# Altium PCB wius.PcbDoc (part 2 of 2)
Units mm, origin at the board's own origin, x right, y up, seen from the top; angles counter-clockwise.
Board outline 54.2 x 28 mm, 6 copper layers (Top Layer, Int1 (GND), Int2 (Sign), Int3 (Sign), Int4 (GND), Bottom Layer), stack 0.776 mm thick; 119 components, 109 nets, 466 pads, 337 vias.
Unrouted connection lines stored in the file: 8.
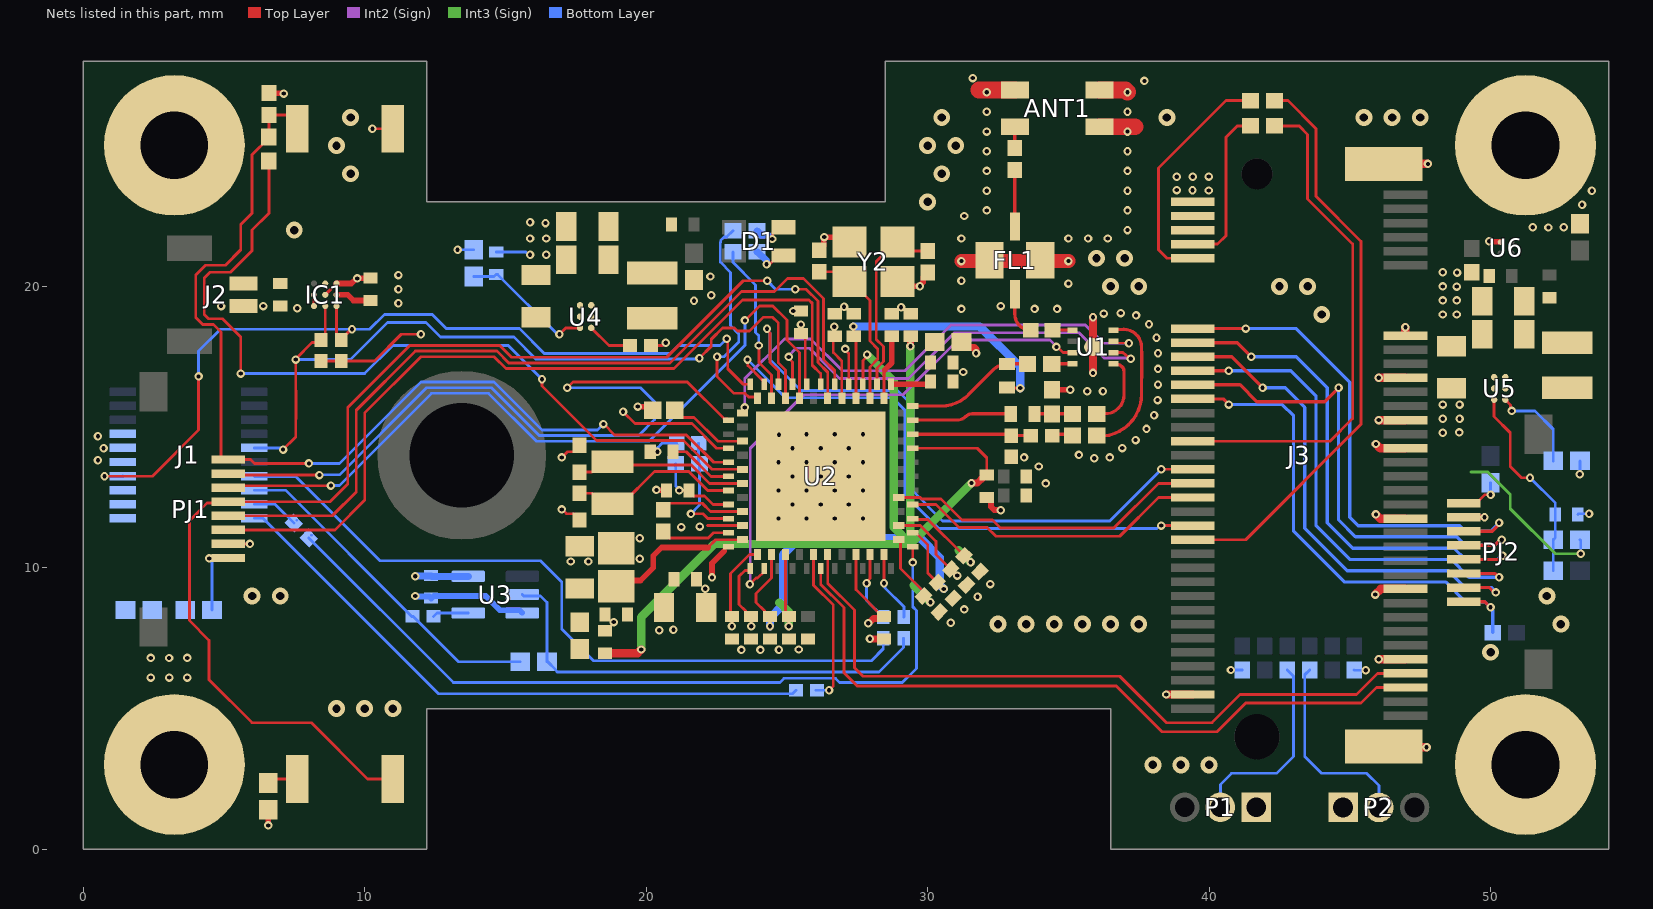
[diagram p6: the nets of this part, all layers, seen from the top]

## Via types
v1: diameter 0.3, hole 0.15, Top Layer to Bottom Layer, tented both sides, 299 vias
v2: diameter 0.6, hole 0.3, Top Layer to Bottom Layer, tented both sides, 37 vias
v3: diameter 0.3/0.3/0.3/0.3/0.3/0.3 (per signal layer), hole 0.15, Top Layer to Bottom Layer, tented both sides, 1 vias

## Nets (pads, with @x,y where several pads share a name; then routed paths per layer and width w, separated by ;. In a path a pad name is that pad's centre, name@x,y a point inside that pad or via, vN(x,y) a via of type N, cw(c..) or ccw(c..) an arc to the next point about the centre after c; other vN are vias at no path point) (continued)
GND: ANT1.2 ANT1.3 ANT1.4 C2.2 C3.2 C5.2 C7.2 C10.2 C11.2 C12.1 C13.1 C14.2 C15.2 C16.2 C17.2 C18.2 C19.2 C21.2 C22.1 C23.2 C24.2 C25.2 C26.2 C27.2 C28.2 C29.2 C30.2 C31.2 C32.2 C33.2 C34.2 C35.2 C36.2 C37.2 C38.2 C39.2 C40.2 C41.2 C42.2 C43.2 C44.1 C45.1 C46.1 C47.2 C48.1 C49.1 C50.2 C51.2 C52.1 C53.2 C54.2 FL1.1 FL1.3 IC1.B2 IC1.C3 J1.09 J1.11 J1.13 J2.2 J3.2 J3.4 J3.6 J3.21 J3.27 J3.33 J3.37 J3.47 J3.57 J3.67 J3.72 J3.SH1 J3.SH2 P1.1 P2.1 pad.1 PJ1.2 PJ2.2 R3.1 R13.1 R20.1 R23.2 R25.2 R29.2 SW1.1 U1.9 U2.A15 U2.EP1 U3.3 U4.A1 U5.A1 U6.B1 Y2.2 Y2.4 | length 43.2
  Top Layer w0.1: PJ1.2@5.15,10.85 v1(5.925,10.85) ; IC1.B2@8.6,19.7 IC1.C3@9,20.1 ; v1(10.275,25.6) SW1.1@11,25.6 ; v1(17,13.925) 17.2,14.125 17.425,14.125 17.625,14.325 C3.2@17.625,14.35 ; v1@17.025,12.075 17.175,11.925 17.425,11.925 17.625,11.725 C2.2@17.625,11.7 ; R13.1@20.175,17.9 20.6,17.9 v1(20.7,18) ; v1(27.07,17.777) 27.07,17.746 27.2,17.616 U2.A15@27.2,16.525
  Top Layer w0.2: v1(6.573,0.848) 6.573,1.405 R3.1@6.572,1.406 ; C42.2@6.6,26.865 6.607,26.858 7.121,26.858 v1(7.128,26.85) ; IC1.C3@9,20.1 9.525,20.1 9.708,20.283 v1(9.735,20.283) 9.743,20.291 10.191,20.291 C47.2@10.2,20.3 ; v1(19.703,15.729) 20.107,15.729 C25.2@20.236,15.6 ; C26.2@20.15,14.125 20.152,14.123 v1(20.4,14.122) v1(20.4,14.122) ; v1(20.365,12.77) 20.375,12.76 20.715,12.76 C28.2@20.725,12.75 ; v1(25.225,19.125) C17.2@25.5,19.125 ; C39.2@26.15,21.28 26.31,21.44 26.31,21.703 26.331,21.724 v1(26.331,21.751) 27.049,21.751 Y2.2@27.225,21.575 ; Y2.4@28.925,20.175 29.096,20.004 v1(29.726,20.004) 29.726,20.031 29.84,20.145 29.84,20.335 C40.2@30,20.495 ; C33.2@32.101,12.495 32.151,12.495 32.251,12.395 32.251,12.172 32.369,12.055 32.595,12.055 v1(32.6,12.05) ; C5.2@34.616,16.323 34.62,16.327 v1(35.069,16.327) ; PJ2.2@49.05,11.8 v1(49.783,11.8) ; v1(49.95,21.6) 49.969,21.581 50.344,21.581 U6.B1@50.35,21.575
  Top Layer w0.25: v1(27.95,7.478) 27.951,7.476 28.449,7.476 C19.2@28.45,7.475
  Top Layer w0.3: v1(35.875,16.925) v1(35.875,18.9) ; v1(38.475,5.5) J3.72@39.425,5.5 ; v1(45.9,9.05) 46.1,9.25 J3.57@46.975,9.25 ; v1(45.925,11.9) 46.075,11.75 J3.47@46.975,11.75 ; v1(45.925,14.4) 46.075,14.25 J3.37@46.975,14.25 ; v1(46.025,6.75) J3.67@46.975,6.75 ; v1(46.025,15.25) J3.33@46.975,15.25 ; v1(46.025,16.75) J3.27@46.975,16.75 ; J3.SH2@46.2,3.65 46.225,3.625 v1(47.725,3.625) ; J3.SH1@46.2,24.35 v1(47.775,24.35) ; J3.21@46.975,18.25 v1(46.975,18.55)
  Top Layer w0.5: v1(31.2,20.9) v1(35,20.9)
  Top Layer w0.6: 31.829,26.971 ANT1.4@33.1,26.971 ; ANT1.2@36.1,25.671 37.371,25.671 ; ANT1.3@36.1,26.971 37.029,26.971 v1(37.1,26.9)
  Bottom Layer w0.1: C53.2@14.675,21.225 15.721,21.225 15.821,21.125 v1(15.875,21.125) ; v1(20.4,14.122) 20.419,14.141 20.419,14.282 20.562,14.425 C41.2@21.085,14.425 ; v1(40.776,6.371) 41.171,6.371 R23.2@41.175,6.375 ; R25.2@45.15,6.375 45.16,6.365 v1(45.562,6.365) ; C54.2@53.1,11.9 53.123,11.923 v1(53.498,11.923) ; v1(53.171,13.327) 53.171,13.796 R29.2@53.175,13.8
  Bottom Layer w0.2: v1(11.8,9) 11.819,8.981 12.294,8.981 12.369,8.906 12.463,9 14.3,9 14.8,8.5 15.5,8.5 U3.3@15.6,8.4
  other v1: 23.384,7.085 24.059,7.085 24.715,7.092 25.421,7.1 20.464,7.786 20.97,7.8 30.825,8.05 18.85,8.075 31.3,8.525 31.775,8.975 32.225,9.425 17.325,10.225 17.95,10.225 24.7,11.75 25.7,11.75 26.7,11.75 27.7,11.75 17,12.075 25.2,12.25 26.2,12.25 27.2,12.25 24.7,12.75 25.7,12.75 26.7,12.75 27.7,12.75 34.2,13 25.2,13.25 26.2,13.25 27.2,13.25 33.95,13.6 24.7,13.75 25.7,13.75 26.7,13.75 27.7,13.75 0.525,13.825 35.917,13.89 33.425,13.925 36.47,13.922 35.376,14.011 0.725,14.25 25.2,14.25 26.2,14.25 27.2,14.25 36.912,14.256 37.388,14.538 0.525,14.675 24.719,14.731 25.7,14.75 26.7,14.75 27.7,14.75 37.775,14.935 38.044,15.419 38.168,15.959 35.672,16.273 36.226,16.278 38.184,16.513 31.266,16.958 38.185,17.067 38.185,17.621 38.13,18.172 37.864,18.658 37.406,18.97 48.3,19 48.8,19 36.26,19.034 36.858,19.05 31.2,19.2 33.8,19.2 34.6,19.2 7.604,19.224 29.057,19.261 27.034,19.275 4.9,19.3 6.4,19.3 32.6,19.3 48.3,19.5 48.8,19.5 48.3,20 48.801,19.992 35,20.1 31.2,20.2 48.3,20.5 48.809,20.49 16.45,21.125 15.875,21.7 16.45,21.7 31.2,21.7 35,21.7 35.7,21.7 36.4,21.7 37.1,22 16.425,22.25 15.875,22.275 31.3,22.5 32.1,22.7 37.1,22.7 32.1,23.4 37.1,23.4 39.984,23.406 38.85,23.42 39.409,23.414 38.847,23.896 39.415,23.893 39.984,23.899 32.1,24.1 37.1,24.1 32.1,24.8 37.1,24.8 32.1,25.5 37.1,25.5 32.1,26.2 37.1,26.2 32.1,26.9 37.7,27.3 31.6,27.4
  other v2: 38,3 39,3 40,3 9,5 10,5 11,5 50,7 32.5,8 33.5,8 34.5,8 35.5,8 36.5,8 37.5,8 52.5,8 6,9 7,9 52,9 44,19 36.5,20 37.5,20 42.5,20 43.5,20 36,21 37,21 7.5,22 30,23 9.5,24 30.5,24 9,25 30,25 31,25 9.5,26 30.5,26 38.5,26 45.5,26 46.5,26 47.5,26
GPIO0: J3.50 R18.2 | length 20.7
  Top Layer w0.1: J3.50@39.425,11 41.3,11 45.4,15.1 45.4,21.6 43.8,23.2 43.8,25.6 42.8,26.6 R18.2@42.325,26.6
GPIO88: J3.36 R17.2 | length 18.1
  Top Layer w0.1: J3.36@39.425,14.5 44.3,14.5 45.1,15.3 45.1,21.5 43.5,23.1 43.5,25.4 43.2,25.7 R17.2@42.325,25.7
I2C_FG_SCL: IC1.B1 J1.12 R8.1 U2.B18 | length 28.8
  Top Layer w0.1: v1(7.1,14.2) 7.521,14.621 7.55,14.65 7.555,15.295 ccw(c7.125,15.3) 7.555,15.301 7.55,17.342 v1(7.55,17.4) 7.55,17.425 8.134,18.009 8.359,18.009 8.6,18.25 IC1.B1@8.6,19.3 ; v1(21.892,17.45) 22.313,17.872 22.313,18.123 22.708,18.518 23.134,18.518 23.242,18.41 23.668,18.41 24.158,18.9 24.5,18.9 24.69,18.71 24.69,17.293 24.95,17.033 U2.B18@24.95,16.025
  Bottom Layer w0.1: J1.12@6.075,14.26 7.04,14.26 v1(7.1,14.2) ; v1(7.55,17.4) 9.5,17.4 10.817,18.717 12.183,18.717 12.7,18.2 15.3,18.2 16.08,17.42 21.861,17.42 v1(21.892,17.45)
I2C_FG_SDA: IC1.C1 J1.07 R7.1 U2.A22 | length 31.5
  Top Layer w0.1: v1(0.757,13.252) 2.452,13.252 4.1,14.9 v1(4.1,16.8) ; IC1.C1@9,19.3 9,18.272 R7.1@9.172,18.1 9.172,18.125 9.522,18.475 v1(9.55,18.475) ; v1(22.866,18.138) 22.901,18.104 22.901,17.074 23.45,16.525 U2.A22@23.7,16.525
  Bottom Layer w0.1: v1(0.757,13.252) 1.397,13.252 J1.07@1.405,13.26 ; v1(4.1,16.8) 4.1,17.7 4.875,18.475 v1(9.55,18.475) 10.175,18.475 10.7,19 12.4,19 12.9,18.5 15.5,18.5 16.38,17.62 20.857,17.62 21.137,17.9 22.627,17.9 v1(22.866,18.138)
JTAG_CLK: J3.20 PJ2.3 | length 18.2
  Top Layer w0.117: J3.20@39.425,18.5 v1(41.3,18.5) ; PJ2.3@49.05,11.3 50.058,11.3 50.141,11.382 50.141,11.391 50.3,11.55 v1(50.3,11.6)
  Bottom Layer w0.117: v1(41.3,18.5) 43.1,18.5 45,16.6 45,11.8 45.3,11.5 48.9,11.5 49.1,11.3 50,11.3 v1(50.3,11.6)
JTAG_NTRST: J3.24 PJ2.7 | length 18
  Top Layer w0.117: J3.24@39.425,17.5 40.8,17.5 v1(41.9,16.4) ; PJ2.7@49.05,9.3 49.115,9.235 49.18,9.3 49.961,9.3 50.135,9.126 v1(50.184,9.126)
  Bottom Layer w0.117: v1(41.9,16.4) 42.7,16.4 43.4,15.7 43.4,11.4 44.9,9.9 48.5,9.9 49.1,9.3 50.05,9.3 50.184,9.166 v1(50.184,9.126)
JTAG_TDI: J3.26 PJ2.6 | length 17.9
  Top Layer w0.117: J3.26@39.425,17 v1(40.7,17) ; PJ2.6@49.05,9.8 49.917,9.8 50.14,9.8 50.272,9.668 v1(50.3,9.668)
  Bottom Layer w0.117: v1(40.7,17) 42.9,17 43.8,16.1 43.8,11.5 45,10.3 48.6,10.3 49.232,9.668 v1(50.3,9.668)
JTAG_TDO: J3.22 PJ2.5 | length 18.5
  Top Layer w0.117: J3.22@39.425,18 41,18 v1(41.5,17.5) ; PJ2.5@49.05,10.3 50.3,10.3 v1(50.428,10.428)
  Bottom Layer w0.117: v1(41.5,17.5) 43.1,17.5 44.2,16.4 44.2,11.6 45.1,10.7 48.7,10.7 49.1,10.3 50.25,10.3 50.378,10.428 v1(50.428,10.428)
JTAG_TMS: J3.28 PJ2.4 | length 18
  Top Layer w0.117: J3.28@39.425,16.5 41.1,16.5 41.7,15.9 44.1,15.9 v1(44.6,16.4) ; PJ2.4@49.05,10.8 50.15,10.8 50.35,11 v1(50.4,11)
  Bottom Layer w0.117: v1(44.6,16.4) 44.6,11.7 45.2,11.1 48.8,11.1 49.1,10.8 50.15,10.8 50.35,11 v1(50.4,11)
LED_G: R11.1 U2.B20 | length 7.9
  Top Layer w0.1: v1(22.521,17.501) 22.521,16.804 23.125,16.2 23.513,16.2 23.646,16.066 23.909,16.066 U2.B20@23.95,16.025
  Bottom Layer w0.1: v1(22.521,17.501) 22.765,17.501 23.291,18.026 23.291,18.318 23,18.609 23,20.496 22.635,20.861 22.635,21.562 22.648,21.574 22.648,21.624 22.774,21.75 22.86,21.75 R11.1@23.085,21.975
LED_R: R10.1 U2.B19 | length 5.8
  Top Layer w0.1: v1(24,17.9) 24.008,17.892 24.008,17.292 24.45,16.85 U2.B19@24.45,16.025
  Bottom Layer w0.1: R10.1@23.085,21.225 23.083,21.222 23.083,20.859 23.89,20.051 23.89,18.364 24,18.254 v1(24,17.9)
NetANT1_1: ANT1.1 C9.2 | length 0.8
  Top Layer w0.117: C9.2@33.1,24.911 ANT1.1@33.1,25.671
NetC1_1: C1.1 U1.4 | length 0.6
  Top Layer w0.117: C1.1@34.407,17.246 U1.4@35.025,17.246
NetC1_2: C1.2 L1.1 U2.A11 | length 4.6
  Top Layer w0.117: U2.A11@29.475,15.75 30.484,15.75 ccw(c30.484,17.116) 31.45,16.15 32.35,17.05 cw(c32.825,16.574) L1.1@32.825,17.246 C1.2@33.55,17.246
NetC2_1: C2.1 U2.A29 Y1.1 | length 6.2
  Top Layer w0.1: C2.1@17.625,12.65 18.075,12.65 18.45,12.275 Y1.1@18.8,12.275 19.15,12.275 20.3,13.425 20.7,13.425 ; 20.701,13.426 21.511,13.426 22.187,12.75 U2.A29@22.925,12.75
NetC3_1: C3.1 U2.B26 Y1.2 | length 6.3
  Top Layer w0.1: C3.1@17.625,13.4 18.075,13.4 18.45,13.775 Y1.2@18.8,13.775 18.925,13.65 21.6,13.65 22.25,13 U2.B26@23.425,13
NetC4_1: C4.1 U1.5 | length 2.6
  Top Layer w0.117: C4.1@36.007,15.475 C4.1@36.004,15.471 36.296,15.471 ccw(c36.296,16.15) 36.975,16.15 36.975,16.975 ccw(c36.725,16.975) U1.5@36.725,17.225
NetC4_2: C4.2 C5.1 L2.1 | length 1.3
  Top Layer w0.117: L2.1@33.798,15.471 C4.2@35.146,15.471
NetC6_1: C6.1 U1.8 | length 5.1
  Top Layer w0.117: C6.1@36.253,14.68 ccw(c36.105,16.167) 37.6,16.167 37.602,17.271 37.602,17.593 37.6,17.84 ccw(c36.967,17.84) 36.971,18.473 ccw(c36.971,18.357) 36.962,18.473 U1.8@36.717,18.455
NetC6_2: C6.2 L3.1 | length 0.8
  Top Layer w0.117: L3.1@34.4,14.7 34.446,14.746 C6.2@35.15,14.746
NetC7_1: C7.1 L3.2 U2.A9 | length 4.2
  Top Layer w0.117: U2.A9@29.475,14.75 32.854,14.75 cw(c32.854,14.579) C7.1@32.975,14.7 L3.2@33.668,14.7
NetC8_1: C8.1 U1.1 | length 0.6
  Top Layer w0.117: C8.1@34.44,18.446 34.64,18.446 U1.1@35.05,18.446
NetC8_2: C8.2 FL1.4 | length 1.6
  Top Layer w0.117: FL1.4@33.1,19.721 33.1,19.006 ccw(c33.66,19.006) C8.2@33.66,18.446
NetC9_1: C9.1 FL1.2 | length 2
  Top Layer w0.117: FL1.2@33.1,22.121 C9.1@33.1,24.131
NetC20_1: C20.1 U2.B28 | length 3
  Top Layer w0.1: C20.1@20.658,12.139 20.815,12.297 21.993,12.297 22.29,12 U2.B28@23.425,12
NetC20_2: C20.2 U2.A32 | length 2.3
  Top Layer w0.1: C20.2@20.767,11.108 20.816,11.058 20.875,11.058 22.208,11.058 22.4,11.25 U2.A32@22.925,11.25
NetC39_1: C39.1 U2.B12 Y2.3 | length 5.9
  Top Layer w0.1: C39.1@26.15,20.52 26.88,20.52 Y2.3@27.225,20.175 27.275,20.175 27.95,19.5 27.95,18.055 28.23,17.775 28.23,17.418 27.95,17.138 U2.B12@27.95,16.025
NetC40_1: C40.1 U2.A13 Y2.1 | length 6.8
  Top Layer w0.1: U2.A13@28.2,16.525 28.2,17.105 28.43,17.335 28.43,17.858 28.175,18.113 28.175,20.875 28.875,21.575 Y2.1@28.925,21.575 29.245,21.255 C40.1@30,21.255
NetC45_2: C45.2 C46.2 FB1.1 L5.2 U4.A2
NetC47_1: C47.1 IC1.C2 | length 1.3
  Top Layer w0.2: IC1.C2@9,19.7 9.003,19.697 9.403,19.697 9.6,19.5 C47.1@10.2,19.5
NetC49_2: C49.2 C52.2 FB2.1 L6.2 U5.A2
NetC53_1: C53.1 R27.2 U4.C1 | length 4.8
  Top Layer w0.1: v1(16.918,18.298) 17.145,18.525 U4.C1@17.65,18.525
  Bottom Layer w0.1: R27.2@13.875,20.35 14.6,20.35 C53.1@14.675,20.425 14.725,20.425 16.813,18.337 16.88,18.337 v1(16.918,18.298)
NetC54_1: C54.1 R28.2 R30.2 U5.C1 | length 7.2
  Top Layer w0.1: U5.C1@50.125,15.975 50.125,15.375 50.7,14.8 50.7,13.6 51.1,13.2 v1(51.4,13.2)
  Bottom Layer w0.1: v1(51.4,13.2) 52.3,12.3 C54.1@52.3,11.9 52.3,11.075 R28.2@52.225,11 R30.2@52.225,9.9
NetD1_2: D1.2 R10.2 | length 1.3
  Top Layer w0.1: v1(24.28,20.789) 24.334,20.789 24.375,20.83 24.43,20.83 24.7,21.1 D1.2@24.875,21.1
  Bottom Layer w0.25: R10.2@23.935,21.225 23.96,21.225 24.27,20.915 24.27,20.798 v1(24.28,20.789)
NetD1_4: D1.4 R11.2 | length 1.3
  Top Layer w0.1: v1(24.477,21.683) 24.5,21.706 24.5,21.9 24.7,22.1 D1.4@24.875,22.1
  Bottom Layer w0.25: R11.2@23.935,21.975 24.085,21.825 24.321,21.825 24.454,21.692 v1@24.467,21.692
NetJ1_02: J1.02 R33.2 | length 21.9
  Bottom Layer w0.1: J1.02@6.075,11.76 6.39,11.76 12.625,5.525 25.2,5.525 R33.2@25.325,5.65
NetJ1_04: J1.04 R32.2 | length 1.7
  Bottom Layer w0.1: J1.04@6.075,12.26 6.815,12.26 R32.2@7.485,11.59
NetJ1_08: J1.08 R31.2 | length 26.6
  Bottom Layer w0.1: J1.08@6.075,13.26 6.085,13.25 7.55,13.25 10.55,10.25 16.25,10.25 17,9.5 17,7.825 18.125,6.7 28,6.7 28.425,7.125 R31.2@28.425,7.5
NetJ3_8: J3.8 R17.1 | length 5.8
  Top Layer w0.1: J3.8@39.425,21.5 40.3,21.5 40.6,21.8 40.6,25.3 41,25.7 R17.1@41.475,25.7
NetJ3_10: J3.10 R18.1 | length 8.5
  Top Layer w0.1: J3.10@39.425,21 38.5,21 38.2,21.3 38.2,24.2 40.6,26.6 R18.1@41.475,26.6
NetL2_2: L2.2 U2.A10 | length 3.5
  Top Layer w0.117: U2.A10@29.475,15.25 31.048,15.25 ccw(c31.048,15.677) 31.35,15.375 cw(c31.583,15.142) 31.583,15.471 L2.2@32.952,15.471
NetL4_1: L4.1 U2.B29 | length 1.2
  Top Layer w0.1: 22.175,11.5 U2.B29@23.425,11.5
  other v1: 19.775,10.325 19.775,11.05 21.25,11.45 21.908,11.464
NetL5_1: L5.1 U4.B2
NetL6_1: L6.1 U5.B2
NetP1_2: P1.2 R15.2 | length 7
  Bottom Layer w0.1: P1.2@40.4,1.5 40.4,2.3 40.8,2.7 42.4,2.7 43,3.3 43,4.712 43,6.15 R15.2@42.775,6.375
NetP2_2: P2.2 R16.2 | length 7
  Bottom Layer w0.1: R16.2@43.575,6.375 43.4,6.2 43.4,3.3 44,2.7 45.6,2.7 46.03,2.27 P2.2@46.03,1.487
NetPJ1_1: PJ1.1 R9.1 | length 2.6
  Top Layer w0.1: v1(4.48,10.334) 5.134,10.334 PJ1.1@5.15,10.35
  Bottom Layer w0.1: v1(4.48,10.334) 4.48,10.28 4.575,10.185 R9.1@4.575,8.5
NetPJ2_1: PJ2.1 R14.1 | length 1.5
  Top Layer w0.1: PJ2.1@49.05,12.3 49.5,12.3 49.8,12.6 v1(50,12.6)
  Bottom Layer w0.1: v1(50,12.6) R14.1@50,13.025
NetR3_2: R3.2 SW2.1 | length 1
  Top Layer w0.1: R3.2@6.547,2.381 R3.2@6.572,2.356 ; R3.2@6.625,2.5 SW2.1@7.6,2.5
NetR4_1: R4.1 R35.2 U3.2 | length 16.6
  Bottom Layer w0.1: U3.2@15.6,9.05 15.65,9 16.25,9 16.475,8.775 16.475,6.669 R4.1@16.478,6.666 16.503,6.666 16.778,6.391 16.778,6.366 16.844,6.3 28.275,6.3 29.146,7.171 29.146,7.496 R35.2@29.15,7.5
NetR13_2: R13.2 U4.C2 | length 1.6
  Top Layer w0.1: U4.C2@18.05,18.525 18.675,17.9 R13.2@19.425,17.9
NetR29_1: R29.1 U5.C2 | length 3.4
  Top Layer w0.1: U5.C2@50.525,15.975 U5.C2@50.525,15.975 50.712,15.787 50.712,15.613 v1(50.75,15.575)
  Bottom Layer w0.1: v1(50.75,15.575) 51.575,15.575 52.225,14.925 R29.1@52.225,13.8
NetR34_1: R34.1 U3.4 | length 1.3
  Bottom Layer w0.1: R34.1@12.45,8.275 12.575,8.4 U3.4@13.68,8.4
NRESET: J3.30 PJ2.8 R26.1 | length 18
  Top Layer w0.117: J3.30@39.425,16 40.5,16 v1(40.7,15.8) ; PJ2.8@49.05,8.8 49.8,8.8 v1(50,8.6)
  Bottom Layer w0.117: v1(40.7,15.8) 42.6,15.8 43,15.4 43,11.3 44.8,9.5 48.4,9.5 49.1,8.8 49.8,8.8 v1(50,8.6) 50,8.55 50.075,8.475 R26.1@50.075,7.7
POC_IN: C42.1 PJ1.8 R6.1 SW1.2 U2.A27 | length 36.5
  Top Layer w0.1: PJ1.8@4.8,13.85 PJ1.8@5.1,13.85 ; SW1.2@7.6,25.6 7.6,25.735 7.25,26.085 C42.1@6.6,26.085 6.6,25.275 6,24.675 6,22.6 5.6,22.2 5.6,21.3 5.05,20.75 4.35,20.75 4,20.4 4,18.9 4.25,18.65 4.632,18.65 4.9,18.382 4.9,13.95 5,13.85 PJ1.8@5.1,13.85 ; v1(8.019,13.709) 6.091,13.709 5.95,13.85 PJ1.8@5.15,13.85 PJ1.8@5.1,13.85 ; v1(18.483,15.108) 18.498,15.108 18.882,14.725 20.605,14.725 21.425,14.725 22.4,13.75 U2.A27@22.925,13.75
  Bottom Layer w0.1: v1(8.019,13.709) 9.109,13.709 12,16.6 14.6,16.6 16.3,14.9 18.267,14.9 18.475,15.108 v1(18.483,15.108)
POC_OUT: R6.2 U2.B25 | length 30
  Top Layer w0.1: v1(5.6,16.9) 5.6,18.2 4.95,18.85 4.45,18.85 4.3,19 4.3,20.3 4.5,20.5 5.234,20.5 6,21.266 6,22 6.6,22.6 R6.2@6.6,24.45 ; v1(16.3,16.7) 16.3,16.46 18.235,14.525 20.688,14.525 21.325,14.525 22.35,13.5 U2.B25@23.425,13.5
  Bottom Layer w0.1: v1(5.6,16.9) 10,16.9 11,17.9 15.1,17.9 v1(16.3,16.7)
RESET_MCU: C41.1 R5.1 U2.A31 | length 4.1
  Top Layer w0.1: v1(21.589,11.917) 21.592,11.92 22.019,11.92 22.189,11.75 U2.A31@22.925,11.75
  Bottom Layer w0.1: v1(21.589,11.917) 21.589,11.92 21.9,12.231 R5.1@21.9,13.7 21.865,13.735 C41.1@21.865,14.425
RF_AVDD: C32.1 C33.1 C34.1 C35.1 R2.2 U2.A8 U2.A14 U2.B11 | length 38.3
  Top Layer w0.1: U2.A14@27.7,16.525 27.7,17.371 27.85,17.521 v1(27.85,17.575) ; U2.B11@28.45,16.025 28.45,17.001 28.474,17.026 ; C35.1@29.39,18.215 C35.1@29.4,18.225 ; U2.A8@29.475,14.25 31.761,14.25 32.101,13.909 C33.1@32.101,13.295
  Top Layer w0.2: 28.474,17.026 28.725,17.276 C34.1@28.725,18.225
  Top Layer w0.25: v1(29.39,17.875) C35.1@29.39,18.215 ; v1(31.559,13.011) 31.767,13.011 31.976,13.22 C33.1@32.026,13.22
  Top Layer w0.3: C32.1@18.537,6.969 19.694,6.969 v3(19.825,7.1)
  Int3 (Sign) w0.3: v3(19.825,7.1) 19.825,8.25 22.421,10.846 29.394,10.846 v1(31.559,13.011) ; v1(27.85,17.575) 28.8,16.625 28.8,11.441 29.39,10.85 v1(29.39,17.875)
RF_SW_ANT: U1.7 U2.B21 | length 17.5
  Top Layer w0.1: U2.B21@23.425,15.5 23.5,15.575 v1(23.5,15.7) ; U1.7@36.6,18.046 36.725,17.996 v1(37.149,17.982)
  Int2 (Sign) w0.1: v1(23.5,15.7) 23.5,16.717 24.913,18.13 25.845,18.13 26.975,17 29.2,17 30.825,18.625 35.6,18.625 36.248,17.977 37.144,17.977 v1(37.149,17.982)
RF_SW_ANT_B: U1.6 U2.A19 | length 15.5
  Top Layer w0.1: v1(25.07,17.493) 25.07,17.439 25.2,17.309 U2.A19@25.2,16.525 ; U1.6@36.6,17.646 36.941,17.646 v1(37.214,17.432)
  Int2 (Sign) w0.1: v1(25.07,17.493) 25.07,17.547 25.323,17.8 25.8,17.8 26.875,16.725 29.325,16.725 30.95,18.35 35.375,18.35 36.275,17.45 37.196,17.45 v1(37.214,17.432)
RF_SW_BT_ANT: U1.3 U2.A35 | length 18.9
  Top Layer w0.1: v1(23.685,9.415) 23.905,9.635 23.96,9.635 24.2,9.875 U2.A35@24.2,9.975 ; v1@34.61,17.85 34.813,17.646 U1.3@35.15,17.646
  Int2 (Sign) w0.1: v1(23.685,9.415) 23.7,9.43 23.7,14.25 25.6,16.15 29.125,16.15 31.075,18.1 34.35,18.1 v1@34.653,17.797
  other v1: 34.575,17.85
RF_VBATT: C29.1 C30.1 R1.2 U2.A12 | length 1.4
  Top Layer w0.1: C30.1@30,16.525 C30.1@30.1,16.625
  Top Layer w0.2: U2.A12@28.7,16.525 C30.1@30,16.525
SPI_FPGA_CS: R33.1 U2.B35 | length 5.7
  Top Layer w0.1: U2.B35@25.95,10.475 25.95,9.383 26.65,8.683 26.65,5.809 26.5,5.659 v1(26.5,5.65)
  Bottom Layer w0.1: R33.1@26.025,5.65 v1(26.5,5.65)
SPI_FPGA_MISO: R32.1 U2.A1 | length 28.4
  Top Layer w0.1: v1(29.47,10.192) 29.47,10.745 U2.A1@29.475,10.75
  Bottom Layer w0.1: R32.1@8.015,11.06 13.15,5.925 24.75,5.925 24.9,6.075 26.725,6.075 26.875,5.925 29.1,5.925 29.6,6.425 29.6,8.487 29.47,8.617 v1(29.47,10.192)
SPI_FPGA_MOSI: R31.1 U2.B39 | length 2.5
  Top Layer w0.1: v1(27.83,9.45) 27.83,9.504 27.95,9.624 U2.B39@27.95,10.475
  Bottom Layer w0.1: v1(27.83,9.45) 27.83,8.845 R31.1@28.425,8.25
SPI_FPGA_SCLK: R35.1 U2.B40 | length 2.5
  Top Layer w0.1: v1(28.45,9.45) U2.B40@28.45,10.475
  Bottom Layer w0.1: v1(28.45,9.45) 28.488,9.412 28.488,9.285 29.157,8.617 29.157,8.257 R35.1@29.15,8.25
SPI_FPGA_SCLK_BUF: J1.06 R4.2 R34.2 | length 12
  Bottom Layer w0.1: J1.06@6.075,12.76 7.19,12.76 11.675,8.275 R34.2@11.7,8.275 11.725,8.275 13.334,6.666 R4.2@15.528,6.666
SPI_GAP_CS: J3.48 U2.A21 | length 21.2
  Top Layer w0.1: v1(23.6,17.4) 23.612,17.388 23.612,17.188 24.125,16.675 24.15,16.675 24.2,16.625 U2.A21@24.2,16.525 ; v1(38.3,11.5) J3.48@39.425,11.5
  Bottom Layer w0.1: v1(23.6,17.4) 24.957,16.043 28.757,16.043 29.2,15.6 29.2,12.597 30.397,11.4 38.146,11.4 38.246,11.5 v1(38.3,11.5)
SPI_GAP_MISO: J3.44 U2.A4 | length 11
  Top Layer w0.1: U2.A4@29.475,12.25 30.301,12.25 31.116,11.435 32.115,11.435 32.425,11.125 32.5,11.125 36.675,11.125 36.825,11.125 38.2,12.5 J3.44@39.425,12.5
SPI_GAP_MOSI: J3.42 U2.B4 | length 11.6
  Top Layer w0.1: U2.B4@28.975,12.5 29.737,12.5 29.787,12.45 30.474,12.45 31.224,11.7 32.3,11.7 32.586,11.414 36.614,11.414 38.2,13 J3.42@39.425,13
SPI_GAP_SCLK: J3.40 U2.A20 | length 23.2
  Top Layer w0.1: v1(24.293,18.498) 24.293,18.453 24.4,18.346 24.4,17.3 24.7,17 U2.A20@24.7,16.525 ; v1(38.3,13.5) J3.40@39.425,13.5
  Bottom Layer w0.1: v1(24.293,18.498) 24.293,18.453 24.4,18.346 24.4,17.4 25.5,16.3 28.925,16.3 29.475,15.75 29.475,12.725 30.53,11.67 36.47,11.67 v1(38.3,13.5)
SWD_SWCLK: PJ1.3 U2.A17 | length 29.3
  Top Layer w0.1: PJ1.3@5.15,11.35 8.95,11.35 10,12.4 10,15.5 12,17.5 14.6,17.5 15.02,17.08 20.984,17.08 23.425,19.521 24.74,19.521 ; 24.741,19.52 25.78,19.52 25.9,19.4 25.9,17.2 26.2,16.9 U2.A17@26.2,16.525
SWD_SWDIO: PJ1.4 U2.A16 | length 30.2
  Top Layer w0.1: PJ1.4@5.15,11.85 8.85,11.85 9.7,12.7 9.7,15.6 11.8,17.7 14.7,17.7 15.12,17.28 20.846,17.28 23.386,19.82 24.557,19.82 25.017,20.28 25.586,20.28 26.3,19.566 26.3,17.4 26.7,17 U2.A16@26.7,16.525
SWD_SWO: PJ1.5 SW2.2 U2.B15 | length 45.6
  Top Layer w0.1: SW2.2@11,2.5 10.1,2.5 8.1,4.5 6,4.5 4.475,6.025 4.475,7.425 3.774,8.126 3.774,11.674 4.4,12.3 5.1,12.3 PJ1.5@5.15,12.35 8.767,12.35 9.4,12.983 9.4,15.7 11.6,17.9 14.8,17.9 15.22,17.48 20.732,17.48 23.452,20.2 v1(24.3,20.2) ; v1(25.3,19.9) 25.683,19.9 26.1,19.483 26.1,17.3 26.45,16.95 U2.B15@26.45,16.025
  Bottom Layer w0.1: v1(24.3,20.2) 24.6,19.9 v1(25.3,19.9)
UART_GAP_RX: J3.71 U2.A39 | length 25.5
  Top Layer w0.1: U2.A39@26.2,9.975 26.2,9.416 27.025,8.591 27.025,6.275 27.5,5.8 36.7,5.8 38.325,4.175 40.275,4.175 41.3,5.2 45.4,5.2 45.95,5.75 J3.71@46.975,5.75
UART_GAP_TX: J3.69 U2.B36 | length 25.5
  Top Layer w0.1: U2.B36@26.45,10.475 26.45,9.45 27.4,8.5 27.4,6.45 27.7,6.15 36.825,6.15 38.475,4.5 40.1,4.5 41.1,5.5 45.234,5.5 45.984,6.25 J3.69@46.975,6.25
UART_ULP_RX: PJ1.7 U2.A24 | length 27.7
  Top Layer w0.1: PJ1.7@5.15,13.35 5.205,13.295 v1(8.392,13.295) ; v1(17.2,16.4) 17.4,16.6 21.463,16.6 22.763,15.3 22.875,15.3 U2.A24@22.925,15.25
  Bottom Layer w0.1: v1(8.392,13.295) 8.402,13.305 9.105,13.305 12.2,16.4 14.5,16.4 16.2,14.7 19.736,14.7 20.3,15.264 20.3,15.9 19.8,16.4 v1(17.2,16.4)
UART_ULP_TX: PJ1.6 U2.B17 | length 27.6
  Top Layer w0.1: PJ1.6@5.15,12.85 5.215,12.915 8.55,12.915 8.555,12.92 8.8,12.92 v1(8.802,12.923) ; v1(23.51,18.79) 23.514,18.79 24.024,19.3 24.5,19.3 25,18.8 25,18.1 25.45,17.65 U2.B17@25.45,16.025
  Bottom Layer w0.1: v1(8.802,12.923) 8.805,12.925 9.102,12.925 12.377,16.2 14.4,16.2 16.1,14.5 20.1,14.5 23.51,17.91 v1(23.51,18.79)
UULP_VOUTSCDC: C25.1 U2.B23 | length 2.9
  Top Layer w0.1: C25.1@21.014,15.6 21.267,15.347 21.703,15.347 22.55,14.5 U2.B23@23.425,14.5
UULP_VOUTSCDC_RETN: C26.1 U2.A28 | length 2.3
  Top Layer w0.1: C26.1@20.95,14.125 21.425,14.125 22.3,13.25 U2.A28@22.925,13.25
VBAT: C51.1 IC1.A1 IC1.A2 J2.1 | length 0.4
  Top Layer w0.1: IC1.A1@8.2,19.3 IC1.A2@8.2,19.7
VBUS: J1.01 J1.03 J1.05 R19.2
VIO: C10.1 C13.2 C14.1 C16.1 C21.1 C27.1 C28.1 C31.1 C43.1 R1.1 R5.2 R7.2 R8.2 R9.2 R12.1 R19.1 R21.2 U2.A3 U2.A26 U2.A30 U2.A33 U2.B1 U2.B14 U2.B31 U2.B33 U3.5 | length 31.5
  Top Layer w0.1: R8.2@8.45,17.35 R7.2@9.172,17.35 10.35,17.35 11.3,18.3 v1(12,18.3) ; v1(19.18,15.546) 19.181,15.546 19.602,15.125 21.625,15.125 22.5,14.25 U2.A26@22.925,14.25 ; v1(21.175,12.75) 21.475,12.75 21.675,12.55 22.071,12.55 22.371,12.25 U2.A30@22.925,12.25 ; 22.775,10.6 22.775,10.7 22.825,10.75 U2.A33@22.925,10.75 ; v1(23.045,7.925) 23.045,8.27 C16.1@23.05,8.275 23,8.325 23,9.8 23.675,10.475 U2.B31@23.95,10.475 ; U2.B33@24.95,10.475 24.95,8.4 C43.1@25.075,8.275 25.065,8.265 v1(25.065,7.925) ; v1(26.68,18.567) 26.68,18.245 C31.1@26.7,18.225 26.65,18.175 26.65,17.65 26.95,17.35 U2.B14@26.95,16.025 ; U2.B1@28.975,11 29.039,10.936 29.039,9.977 29.85,9.165 C21.1@29.85,9 29.875,9 v1(30.1,8.775) ; U2.A3@29.475,11.75 29.506,11.719 30.006,11.719 C10.1@31.292,10.433 v1(31.525,10.2)
  Top Layer w0.2: v1(22.339,9.661) 22.339,10.164 22.775,10.6
  Top Layer w0.25: R1.1@31.2,18.025 31.4,17.825 31.661,17.825 31.714,17.773 31.714,17.633 v1(31.723,17.623)
  Int3 (Sign) w0.3: 24.735,8.765 25.065,8.435 v1(25.065,7.925) ; 29.5,9.375 v1(30.1,8.775) ; 31.107,10.618 v1(31.525,10.2)
  Bottom Layer w0.1: C27.1@12.369,9.706 C27.1@12.375,9.7 ; R5.2@21.05,13.7 21.05,12.909 21.175,12.784 v1(21.175,12.75)
  Bottom Layer w0.25: v1(11.8,9.7) 11.803,9.703 12.366,9.703 C27.1@12.369,9.706 ; C27.1@12.375,9.7 U3.5@13.68,9.7
  other v1: 2.4,6.1 3.056,6.1 3.7,6.1 2.4,6.8 3.051,6.798 3.7,6.8 22.101,9.26 21.699,19.493 22.313,19.687 22.281,20.35 51.5,22.1 52.056,22.092 52.6,22.1 53.249,22.9 53.6,23.4
VOUTBCKDC: C12.2 C15.1 L4.2 R2.1 U2.B30 | length 5.4
  Top Layer w0.1: L4.2@18.937,9.343 L4.2@19.144,9.55 ; 22.2,10.725 22.475,11 U2.B30@23.425,11
  Top Layer w0.2: L4.2@19.144,9.55 19.8,9.55 20.25,10 20.25,10.425 20.55,10.725 22.2,10.725
VOUTLDO1P8: C22.2 C23.1 U2.A2 U2.B32 | length 15.5
  Top Layer w0.1: v1(24.4,7.925) C22.2@24.4,8.275 24.35,8.275 24.2,8.425 24.2,8.475 23.9,8.775 23.9,9.092 24.45,9.642 U2.B32@24.45,10.475 ; U2.A2@29.475,11.25 29.575,11.25 30.001,10.824 30.001,9.824 C23.1@30.342,9.483 v1(30.575,9.25)
  Bottom Layer w0.3: v1(24.4,7.925) 24.4,8.225 24.871,8.696 24.871,10.471 25.452,11.052 29.743,11.052 30.427,10.368 30.427,9.398 v1(30.575,9.25)
VOUTLDOAFE: C38.1 L1.2 U2.B13 | length 10.3
  Top Layer w0.1: v1(27.365,18.575) 27.365,18.235 27.45,18.15 U2.B13@27.45,16.025 ; L1.2@32.84,16.387 L1.2@33.04,16.387 ; L1.2@33.025,16.401 L1.2@33.04,16.387 ; v1(33.294,16.387) L1.2@33.04,16.387
  Bottom Layer w0.3: v1(27.365,18.575) 31.85,18.575 33.294,17.131 v1(33.294,16.387)
VOUTLDOSOC: C11.1 C17.1 C18.1 C19.1 U2.A18 U2.A34 U2.B2 U2.B38 | length 11.1
  Top Layer w0.1: U2.A34@23.7,9.975 23.65,9.925 23.65,9.909 23.509,9.909 23.3,9.7 23.3,8.7 23.525,8.475 23.525,8.425 23.675,8.275 C11.1@23.725,8.275 23.734,8.266 v1(23.734,7.925) ; v1(25.5,18.644) C17.1@25.5,18.325 25.65,18.175 25.65,16.575 U2.A18@25.7,16.525 ; U2.B38@27.45,10.475 27.45,9.225 C19.1@28.4,8.275 ; U2.B2@28.975,11.5 29.737,11.5 30.295,10.942 30.295,10.48 C18.1@30.817,9.958 v1(31.05,9.725)
  Top Layer w0.25: v1(27.892,8.029) 27.906,8.029 28.077,8.2 28.375,8.2 C19.1@28.45,8.275 C19.1@28.4,8.275
VSYS: C44.2 C48.2 IC1.B3 R27.1 R28.1 U4.B1 U5.B1 | length 6.5
  Int3 (Sign) w0.1: 49.3,13.4 49.9,13.4 50.7,12.6 50.7,12.1 52.3,10.5 v1(53.2,10.5)
  Bottom Layer w0.1: v1(13.3,21.3) R27.1@13.875,21.3 ; R28.1@53.175,11 53.2,10.975 v1(53.2,10.5)
  other v1: 48.3,14.8 48.889,14.811 48.3,15.3 48.9,15.3 48.3,15.8 48.9,15.8 11.2,19.4 11.2,19.9 11.2,20.4
pads on no net: IC1.A3 J2.3 J2.4 J3. J3.5 J3.11 J3.23 J3.25 J3.29 J3.31 J3.35 J3.38 J3.39 J3.41 J3.43 J3.45 J3.46 J3.49 J3.51 J3.53 J3.55 J3.59 J3.60 J3.61 J3.62 J3.63 J3.64 J3.65 J3.66 J3.68 J3.70 J3.73 J3.74 J3.75 MP1.1 PJ1.0 PJ2.0 U1.2 U2.A41 U2.A42 U2.A43 U2.A44 U2.B5 U2.B9 U2.B10 U2.B16 U2.B27 U2.B37 U3.1

## Polygon pours and split planes (outlines as drawn)
GND on Bottom Layer "GND_L06_P088" (solid, pour order 88): 0,0 54.2,0 54.2,28 0,28
1V8_SW on Bottom Layer "1V8_SW_L06_P076" (solid, pour order 76): 48.702,23.595 48.7,23.592 48.7,6.7 36.5,6.7 36.5,0 54.2,0 54.2,23.6 48.7,23.6
NetL4_1 on Bottom Layer "NETL4_1_L06_P074" (solid, pour order 74): 19.6,10.125 19.6,11.625 22.25,11.625 22.25,10.125
GND on Bottom Layer "GND_L06_P060" (solid, pour order 60): 1.87,13.61 0.015,13.61 0,13.625 0,14.91 1.87,14.91
VIO on Bottom Layer "VIO_L06_P040" (solid, pour order 40): 2.1,8.825 2.1,6.8 2.1,5.8 3.975,5.8 3.975,8.825
VBUS on Bottom Layer "VBUS_L06_P039" (solid, pour order 39): 1.87,8.175 1.87,12.91 0.94,12.91 0.93,12.9 0,12.9 0,8.175
GND on Top Layer "GND_L01_P085" (solid, pour order 85): 0,0 54.2,0 54.2,28 0,28
GND on Top Layer "GND_L01_P069" (solid, pour order 69): 33.239,14.251 33.239,12.411 33.325,12.325 34.375,12.325 34.375,14.25 33.239,14.25
3V3 on Top Layer "3V3_L01_P078" (solid, pour order 78): 33.128,12.329 33.357,12.1 34.6,12.1 34.6,13.4 35.8,13.4 35.8,11.6 32.747,11.6 32.744,11.604 32.744,12.35 33.107,12.35 33.128,12.329
VOUTBCKDC on Top Layer "VOUTBCKDC_L01_P017" (solid, pour order 17): 17.962,7.719 17.962,8.444 18.287,8.769 19.137,8.769 19.137,8.094 19.812,8.094 19.962,8.244 19.962,9.744 19.787,9.919 18.287,9.919 17.987,9.619 17.137,9.619 17.137,8.594 17.312,8.419 17.312,7.719
GND on Top Layer "GND_L01_P084" (solid, pour order 84): 18.1,7.575 18.1,8.45 18.3,8.65 19,8.65 19,7.575
GND on Top Layer "GND_L01_P075" (solid, pour order 75): 20.775,9.85 20.275,9.35 20.275,7.55 21.2,7.55 21.2,9.85
GND on Top Layer "GND_L01_P000" (solid, pour order 0): 22.8,6.9 22.8,7.675 26,7.675 26,6.9
GND on Top Layer "GND_L01_P072" (solid, pour order 72): 30.097,8.399 31.884,10.185 31.893,10.185 32.675,9.404 32.675,9.4 30.886,7.611
GND on Top Layer "GND_L01_P020" (solid, pour order 20): 26.45,19.425 26.45,18.825 27.618,18.825 27.618,19.425
GND on Top Layer "GND_L01_P007" (solid, pour order 7): 28.475,19.45 28.475,18.825 29.65,18.825 29.65,19.45
1V8 on Top Layer "1V8_L01_P029" (solid, pour order 29): 50.55,20.125 54.2,20.125 54.2,21.6 51.125,21.6 51.125,20.622 50.553,20.622 50.55,20.625
VSYS on Top Layer "VSYS_L01_P042" (solid, pour order 42): 8.492,20.1 8.5,20.108 8.5,22.7 15.284,22.7 15.284,19.296 16.563,19.296 16.599,19.26 16.599,18.54 15.579,18.54 10.9,18.54 10.9,20.8 9.192,20.8 8.708,20.1
GND on Top Layer "GND_L01_P008" (solid, pour order 8): 30.7,17.55 30.7,16.375 31.451,16.375 31.451,17.55
GND on Top Layer "GND_L01_P068" (solid, pour order 68): 8.2,19.408 8.198,19.406 7.344,19.406 7.2,19.55 5.6,19.55 4.6,19.55 4.6,19.05 8.058,19.05 8.2,19.192
NetL4_1 on Top Layer "NETL4_1_L01_P073" (solid, pour order 73): 21,11.25 21,11.625 22.25,11.625 22.25,11.375 22.125,11.25
GND on Top Layer "GND_L01_P016" (solid, pour order 16): 18.137,11.119 18.137,10.044 17.137,10.044 17.137,11.119
NetC45_2 on Top Layer "NETC45_2_L01_P022" (solid, pour order 22): 21.115,20.075 21.115,22.575 18.3,22.575 18.3,20.465 17.96,19.397 18.046,19.22 18.095,19.22 19.314,20.075
3V3 on Top Layer "3V3_L01_P070" (solid, pour order 70): 32.5,13.5 32.5,12.325 33.127,12.325 33.127,13.5
VIO on Top Layer "VIO_L01_P010" (solid, pour order 10): 21.562,8.094 21.562,9.944 22.487,9.944 22.487,8.094
3V3 on Top Layer "3V3_L01_P043" (solid, pour order 43): 21.375,20.825 21.375,23 22.6,23 22.6,20.827 22.598,20.825 22.025,20.825
VBAT on Top Layer "VBAT_L01_P067" (solid, pour order 67): 7.892,19.808 7.35,20.35 5.6,20.35 5.2,20.35 5.2,19.85 7.25,19.85 7.508,19.592 8.2,19.592 8.2,19.808 8.2,19.592 8.2,19.808
GND on Top Layer "GND_L01_P046" (solid, pour order 46): 48.115,17.515 49.135,17.515 50.044,16.694 50.206,16.856 50.205,16.856 49.96,17.865 49.96,19.935 50.15,20.125 50.15,20.625 49.675,20.625 49.6,20.7 48.115,20.7 48.115,20.685
GND on Top Layer "GND_L01_P045" (solid, pour order 45): 40.2,21.85 38.65,21.85 38.65,23.15 38.648,23.152 38.648,24.101 40.199,24.101 40.2,24.1
VIO on Top Layer "VIO_L01_P044" (solid, pour order 44): 21.375,20.575 23.2,20.575 23.2,20.475 23.2,20 22.3,19.1 21.375,19.1
NetL5_1 on Top Layer "NETL5_1_L01_P023" (solid, pour order 23): 18.043,19.036 19.325,19.275 21.125,19.275 21.125,18.5 19.325,18.5 18.222,18.818 18.043,18.818
VSYS on Top Layer "VSYS_L01_P025" (solid, pour order 25): 15.579,19.295 16.73,19.295 16.985,19.04 17.65,19.04 17.65,18.81 17.649,18.809 16.983,18.809 16.714,18.54 15.579,18.54
GND on Top Layer "GND_L01_P026" (solid, pour order 26): 15.579,20.04 16.772,20.04 17.569,19.244 17.731,19.406 17.524,20.465 17.524,22.585 15.577,22.585 15.575,22.583
1V8 on Top Layer "1V8_L01_P037" (solid, pour order 37): 50.75,21.273 50.75,21.077 50.948,21.077 51.15,20.875 51.15,21.474 50.948,21.273
VIO on Top Layer "VIO_L01_P035" (solid, pour order 35): 54.2,21.75 54.2,23.675 51.125,23.675 51.125,21.75
VSYS on Top Layer "VSYS_L01_P034" (solid, pour order 34): 50.125,16.26 50.125,16.49 49.44,16.735 48.115,16.735 48.115,14.635 48.125,14.625 49.6,14.625 49.6,16.099 50.125,16.26 49.764,16.26
NetL6_1 on Top Layer "NETL6_1_L01_P032" (solid, pour order 32): 50.525,16.49 51.35,16.8 53.5,16.8 53.5,16 51.3,16 50.525,16.26
NetC49_2 on Top Layer "NETC49_2_L01_P031" (solid, pour order 31): 51.513,17.6 51.7,17.6 51.7,17.625 51.46,17.865 50.74,17.865 50.444,16.856 50.606,16.694 50.444,16.856 50.606,16.694
NetC49_2 on Top Layer "NETC49_2_L01_P030" (solid, pour order 30): 54.2,17.6 54.2,19.96 50.74,19.96 50.74,17.61 50.75,17.6
1V8_SW on Top Layer "1V8_SW_L01_P028" (solid, pour order 28): 50.848,21.575 50.652,21.575 50.653,21.576 50.391,21.925 48.4,21.925 48.4,23.4 50.85,23.4 50.848,23.398
1V8_SW on Top Layer "1V8_SW_L01_P027" (solid, pour order 27): 46.2,21.1 46.2,23.4 48.425,23.4 48.425,21.1 46.2,21.1
RF_AVDD on Top Layer "RF_AVDD_L01_P021" (solid, pour order 21): 28.502,18.417 28.502,18.017 29.652,18.017 29.652,18.417
RF_AVDD on Top Layer "RF_AVDD_L01_P019" (solid, pour order 19): 17.312,7.469 18.062,7.469 20,7.469 20,6.419 17.312,6.419
NetL4_1 on Top Layer "NETL4_1_L01_P014" (solid, pour order 14): 18.287,11.269 18.287,10.119 19.962,10.119 19.962,11.269
RF_VBATT on Top Layer "RF_VBATT_L01_P006" (solid, pour order 6): 29.9,16.375 29.9,18.35 30.6,18.35 30.6,17.7 30.45,17.7 30.3,17.55 30.3,16.375 29.9,16.375
VIO on Int3 (Sign) "VIO_L04_P081" (solid, pour order 81): 0,0 54.2,0 54.2,28 0,28
3V3 on Int3 (Sign) "3V3_L04_P080" (solid, pour order 80): 21.4,22 31.8,22 35.8,18 35.8,12.3 34.4,12.3 34.4,18 31.8,20.6 21.4,20.6
VOUTLDOSOC on Int3 (Sign) "VOUTLDOSOC_L04_P079" (solid, pour order 79): 23.477,8.1 26.5,8.1 26.719,8.27 29.08,8.28 32.7,11.9 32.7,17.8 31.449,19.051 25.7,19.051 25.7,18.5 25.277,18.502 25.277,19.177 26.4,20.3 31.749,20.3 34.2,17.849 34.2,10.45 30.925,7.175 23.477,7.175
VSYS on Int3 (Sign) "VSYS_L04_P059" (solid, pour order 59): 8.5,20.592 8.5,8 11.5,5 47,5 49.5,7.5 49.5,16.5 47.5,16.5 47.5,9 33.5,9 30.95,6.45 18.4,6.45 16.35,8.5 11.4,8.5 11.4,20.592
GND on Int2 (Sign) "GND_L03_P086" (solid, pour order 86): 0,0 54.2,0 54.2,28 0,28
GND on Int1 (GND) "GND_L02_P089" (solid, pour order 89): 0,0 54.2,0 54.2,28 0,28
GND on Int4 (GND) "GND_L05_P090" (solid, pour order 90): 0,0 54.2,0 54.2,28 0,28

## Keep-outs
Top Layer:
  rectangle: 31.649,21.568 34.546,22.227
  rectangle: 31.65,19.653 34.546,20.312
Keep-Out Layer:
  rectangle: 32.5,22.25 36.707,28

## Other copper
Top Layer:
  region: 12.664,7.469 12.654,7.464 12.633,7.444 12.623,7.439 12.603,7.418 12.593,7.413 12.582,7.403 12.57,7.416 12.565,7.426 12.526,7.464 12.491,7.48 12.47,7.485 12.424,7.49 12.409,7.485 12.368,7.48 12.302,7.444 12.274,7.421 12.254,7.401 12.248,7.39 12.238,7.38 12.233,7.37 12.192,7.283 12.182,7.248 12.172,7.207 12.162,7.135 12.157,7.069 12.162,7.054 12.167,7.018 12.197,6.962 12.225,6.934 12.261,6.919 12.302,6.909 12.378,6.914 12.455,6.955 12.465,6.965 12.475,6.97 12.501,6.995 12.508,6.993 12.514,6.983 12.534,6.962 12.539,6.952 12.559,6.932 12.565,6.921 12.57,6.916 12.547,6.893 12.536,6.888 12.526,6.878 12.516,6.873 12.506,6.863 12.429,6.827 12.368,6.812 12.317,6.807 12.251,6.812 12.236,6.817 12.208,6.825 12.169,6.842 12.134,6.868 12.124,6.878 12.116,6.881 12.111,6.891 12.095,6.906 12.09,6.916 12.07,6.952 12.06,6.977 12.052,7.011 12.047,7.041 12.045,7.135 12.05,7.151 12.057,7.209 12.062,7.23 12.067,7.255 12.075,7.283 12.088,7.316 12.108,7.367 12.152,7.441 12.162,7.452 12.167,7.462 12.22,7.515 12.231,7.52 12.241,7.531 12.327,7.571 12.368,7.582 12.404,7.587 12.452,7.589 12.503,7.584 12.544,7.574 12.587,7.551 12.633,7.515 12.646,7.503 12.651,7.492 12.661,7.482 12.666,7.472
  region: 10.033,6.919 10.077,6.916 10.061,6.83 10.056,6.819 9.524,6.817 9.521,6.84 9.526,6.855 9.539,6.914 9.562,6.937 9.567,6.947 9.603,6.983 9.608,6.993 9.643,7.028 9.648,7.039 9.679,7.069 9.684,7.079 9.72,7.115 9.725,7.125 9.755,7.156 9.761,7.166 9.796,7.202 9.801,7.212 9.837,7.248 9.842,7.258 9.873,7.288 9.878,7.299 9.914,7.334 9.919,7.345 9.954,7.38 9.959,7.39 9.99,7.421 9.995,7.431 10.031,7.467 10.033,7.48 9.664,7.482 9.671,7.525 9.682,7.576 9.697,7.582 10.199,7.579 10.191,7.536 10.181,7.485 10.153,7.457 10.148,7.446 10.112,7.411 10.107,7.401 10.072,7.365 10.066,7.355 10.031,7.319 10.026,7.309 9.99,7.273 9.985,7.263 9.954,7.232 9.949,7.222 9.914,7.186 9.908,7.176 9.873,7.141 9.868,7.13 9.832,7.095 9.827,7.085 9.791,7.049 9.786,7.039 9.75,7.003 9.745,6.993 9.715,6.962 9.71,6.952 9.679,6.921 10.028,6.919
  region: 7.913,6.817 7.65,6.819 7.813,7.645 7.031,7.648 7.023,7.62 7,7.5 7.497,7.497 7.446,7.248 6.946,7.243 6.939,7.199 6.924,7.123 6.921,7.1 7.415,7.095 7.408,7.051 7.362,6.822 7.347,6.817 6.513,6.819 6.518,6.84 6.669,7.587 6.735,7.918 6.74,7.928 8.858,7.926 8.853,7.905 8.805,7.668 8.772,7.503 9.014,7.5 9.021,7.523 9.029,7.556 9.075,7.785 9.08,7.806 9.1,7.908 9.105,7.928 9.455,7.926 9.45,7.91 9.233,6.832 9.228,6.817 8.884,6.819 8.891,6.868 8.963,7.225 8.965,7.243 8.723,7.245 8.715,7.222 8.659,6.932 8.654,6.911 8.634,6.819 8.29,6.817 8.287,6.835 8.292,6.85 8.366,7.215 8.448,7.622 8.45,7.645 8.167,7.648 8.16,7.62 8.111,7.383 7.999,6.822 7.984,6.817 7.918,6.817
  region: 11.323,7.531 11.333,7.541 11.344,7.546 11.41,7.576 11.43,7.582 11.466,7.587 11.504,7.589 11.55,7.584 11.57,7.579 11.596,7.569 11.637,7.543 11.662,7.518 11.657,7.508 11.649,7.5 11.639,7.495 11.604,7.459 11.593,7.454 11.573,7.434 11.542,7.464 11.532,7.469 11.496,7.485 11.445,7.49 11.43,7.485 11.41,7.48 11.384,7.469 11.336,7.436 11.295,7.395 11.259,7.319 11.249,7.283 11.244,7.263 11.239,7.227 11.234,7.207 11.155,6.817 11.045,6.819 11.053,6.868 11.058,6.898 11.191,7.561 11.196,7.582 11.305,7.579 11.29,7.503 11.293,7.5 11.321,7.528
  region: 13.049,7.564 13.082,7.576 13.102,7.582 13.138,7.587 13.186,7.589 13.227,7.584 13.248,7.579 13.273,7.569 13.314,7.543 13.322,7.536 13.332,7.531 13.339,7.523 13.345,7.513 13.355,7.503 13.38,7.446 13.39,7.385 13.385,7.299 13.38,7.283 13.352,7.148 13.291,6.842 13.286,6.822 13.271,6.817 13.171,6.819 13.176,6.84 13.245,7.179 13.265,7.281 13.273,7.35 13.268,7.406 13.248,7.441 13.24,7.454 13.23,7.459 13.22,7.469 13.194,7.48 13.174,7.485 13.128,7.49 13.113,7.485 13.074,7.477 13.049,7.467 13.008,7.441 13,7.434 12.99,7.429 12.983,7.421 12.977,7.411 12.962,7.395 12.932,7.329 12.921,7.294 12.916,7.273 12.886,7.11 12.881,7.09 12.825,6.819 12.715,6.817 12.712,6.825 12.717,6.84 12.934,7.918 12.939,7.928 13.049,7.926 13,7.689 12.97,7.536 12.967,7.513 12.97,7.51 12.995,7.536 13.005,7.541 13.036,7.561 13.046,7.561
  region: 11.815,7.528 11.82,7.543 11.828,7.576 11.843,7.582 11.937,7.579 11.93,7.531 11.879,7.276 11.874,7.245 11.792,6.837 11.787,6.817 11.677,6.819 11.685,6.868 11.813,7.505 11.815,7.523
  region: 10.615,7.811 10.609,7.785 10.5,7.788 10.505,7.839 10.51,7.854 10.525,7.926 10.635,7.928 10.637,7.915 10.632,7.9 10.617,7.814
  region: 10.694,6.875 10.699,6.891 10.696,6.893 10.671,6.868 10.66,6.863 10.65,6.853 10.594,6.827 10.558,6.817 10.538,6.812 10.472,6.807 10.423,6.814 10.383,6.83 10.342,6.855 10.306,6.891 10.301,6.901 10.281,6.947 10.27,6.988 10.275,7.1 10.281,7.115 10.375,7.582 10.485,7.579 10.477,7.531 10.39,7.097 10.385,7.046 10.383,7.039 10.388,7.023 10.393,6.983 10.418,6.947 10.436,6.929 10.462,6.919 10.502,6.909 10.569,6.914 10.594,6.924 10.65,6.955 10.694,6.998 10.699,7.008 10.729,7.074 10.739,7.115 10.834,7.582 10.946,7.576 10.948,7.574 10.943,7.559 10.826,6.962 10.821,6.942 10.795,6.819 10.686,6.817 10.683,6.825 10.688,6.84 10.694,6.87
  region: 10.933,7.926 10.905,7.785 10.795,7.788 10.801,7.839 10.806,7.854 10.821,7.926 10.931,7.928
  region: 11.871,7.793 11.879,7.836 11.894,7.913 11.899,7.928 12.009,7.926 12.001,7.882 11.991,7.831 11.986,7.801 11.981,7.785 11.871,7.788

## Silkscreen, mask and mechanical layers (free items; w line width, h text height)
Top Overlay:
  text "WiUS v1.0" at 6.7,8.8 h1.1
  text "vsergei / cehirschi / april 2024" at 29.528,5.4 h0.8
Top Solder:
  drawing of 10 lines, arcs and shapes, not listed
Mechanical 1:
  the board outline again, w0.254
Mechanical 4:
  lines w0: 0,0 0,18.5 2.6,18.5 2.6,22.125 0,22.125 0,28 12.2,28 12.2,23 28.5,23 28.5,28 54.2,28 54.2,0 36.5,0 36.5,5 12.2,5 12.2,0 0,0